# Altium PCB PCB1.PcbDoc
Units mm, origin at the board's own origin, x right, y up, seen from the top; angles counter-clockwise.
Board outline 67.2 x 57.2 mm, 2 copper layers (Top Layer, Bottom Layer); 54 components, 24 nets, 133 pads, 60 vias.
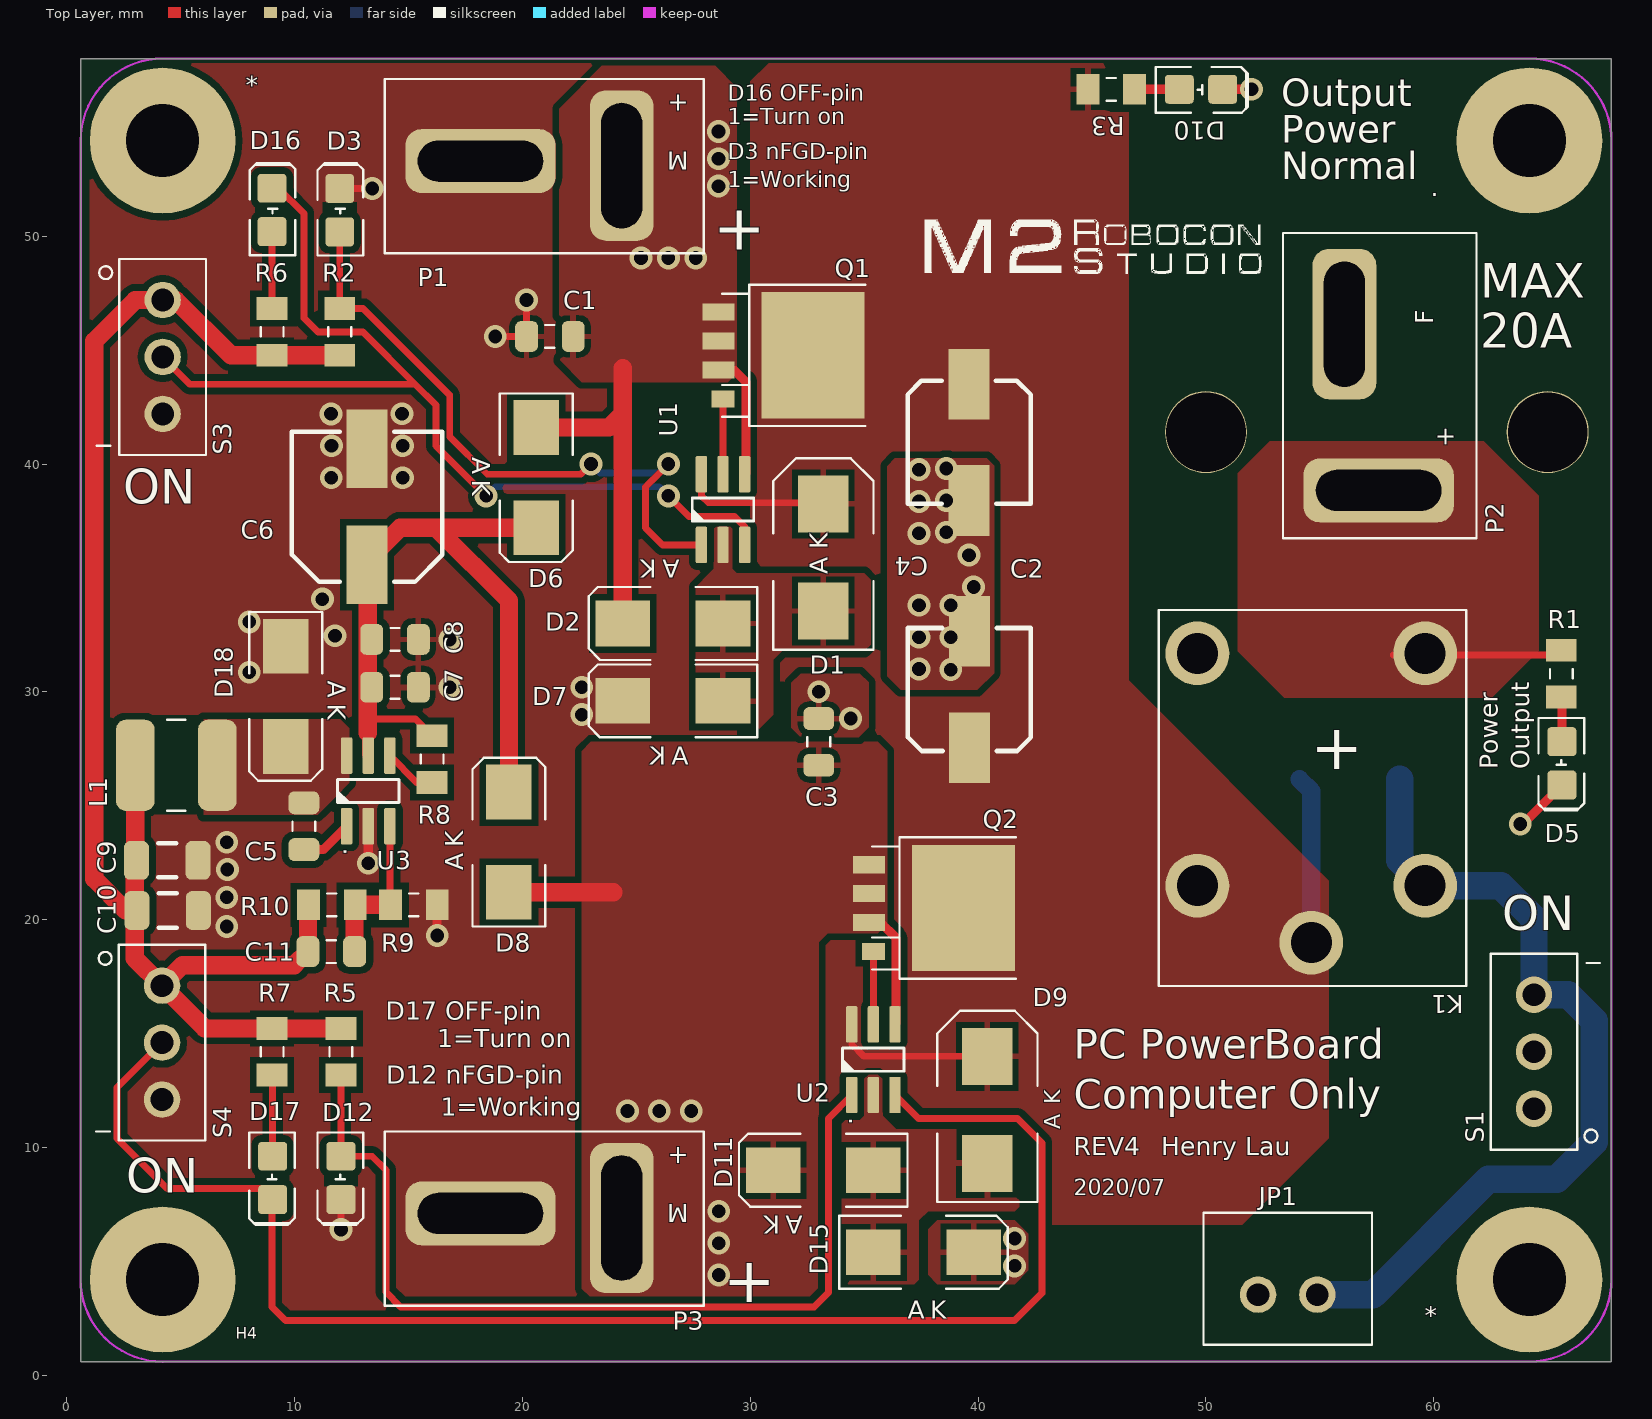
[diagram p0: Top Layer view]
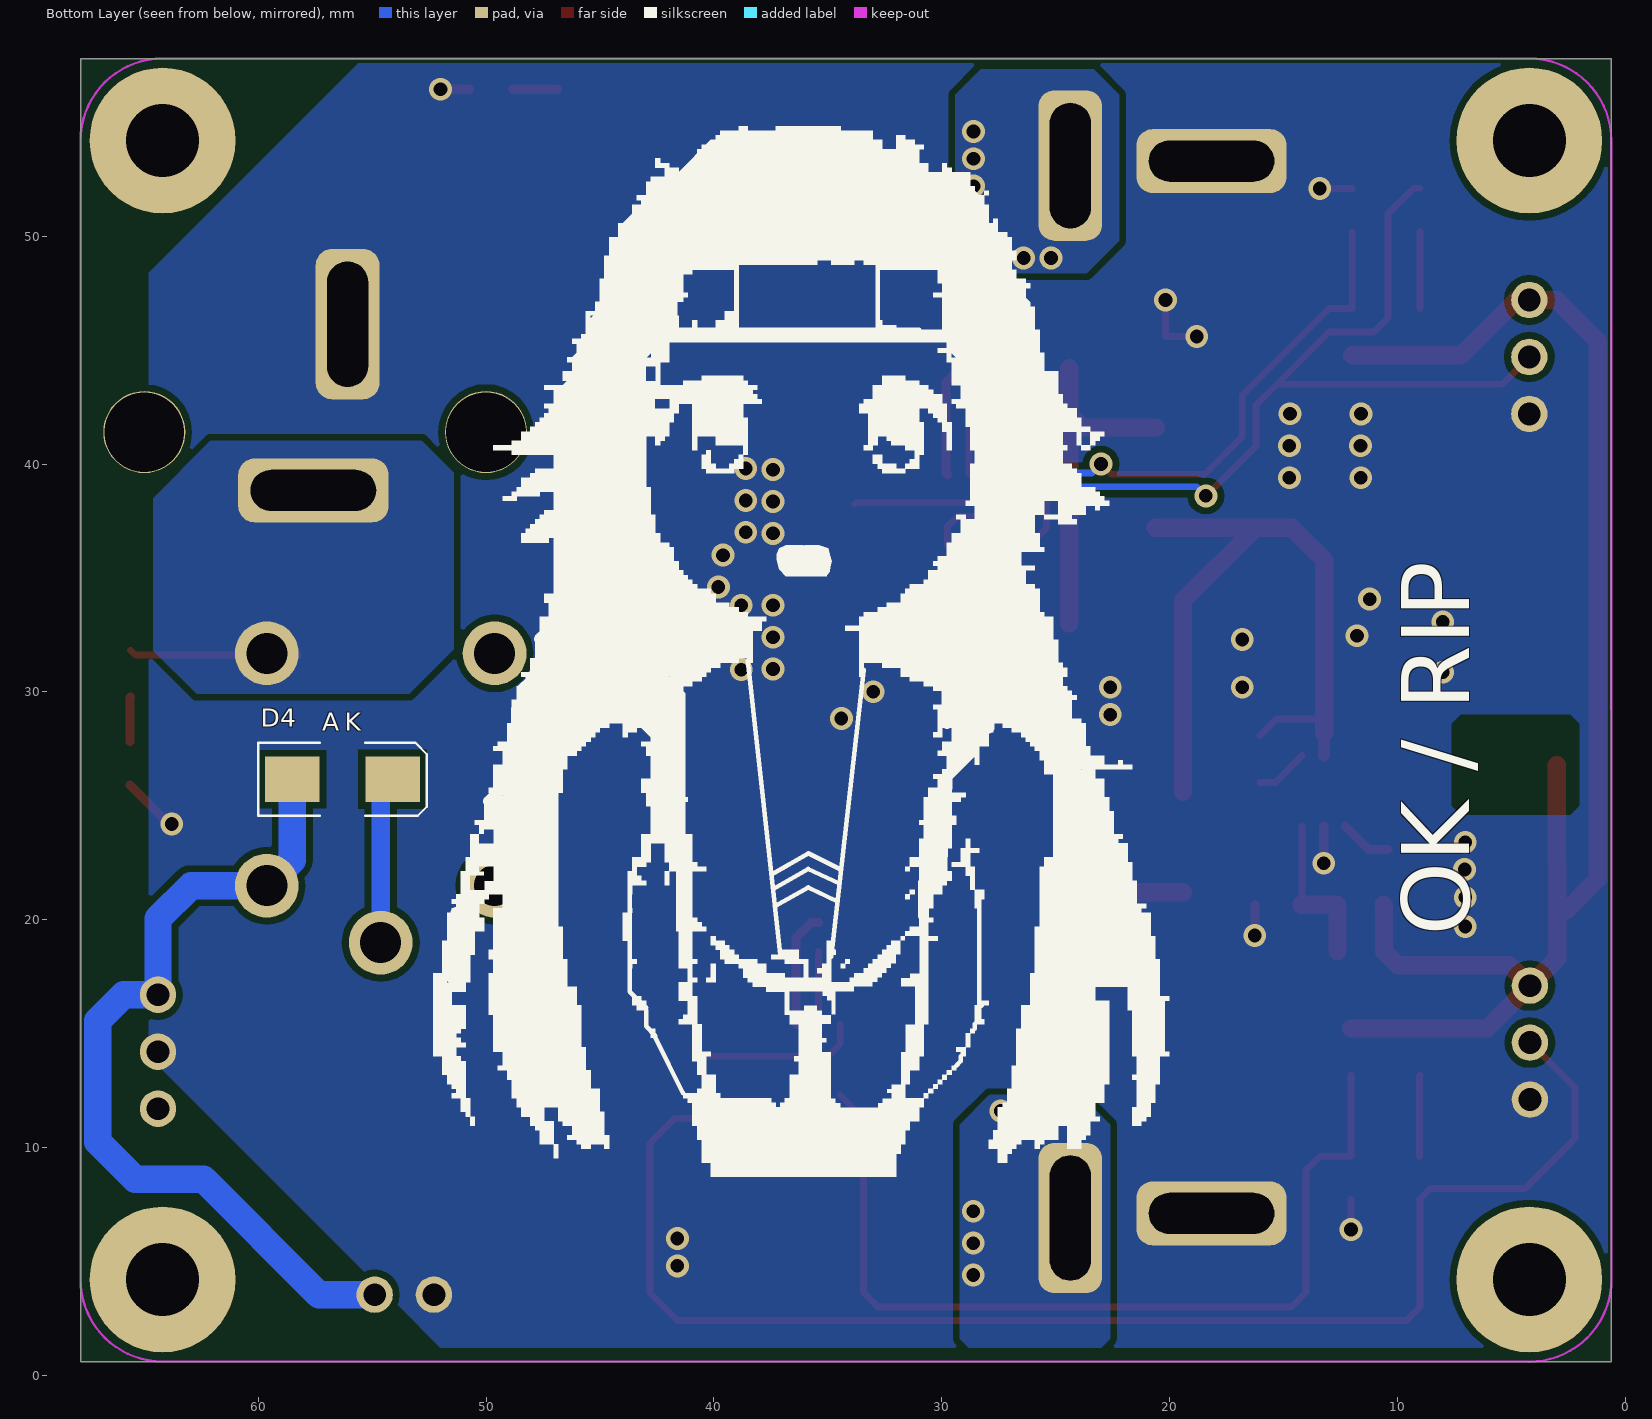
[diagram p1: Bottom Layer view, seen from below]
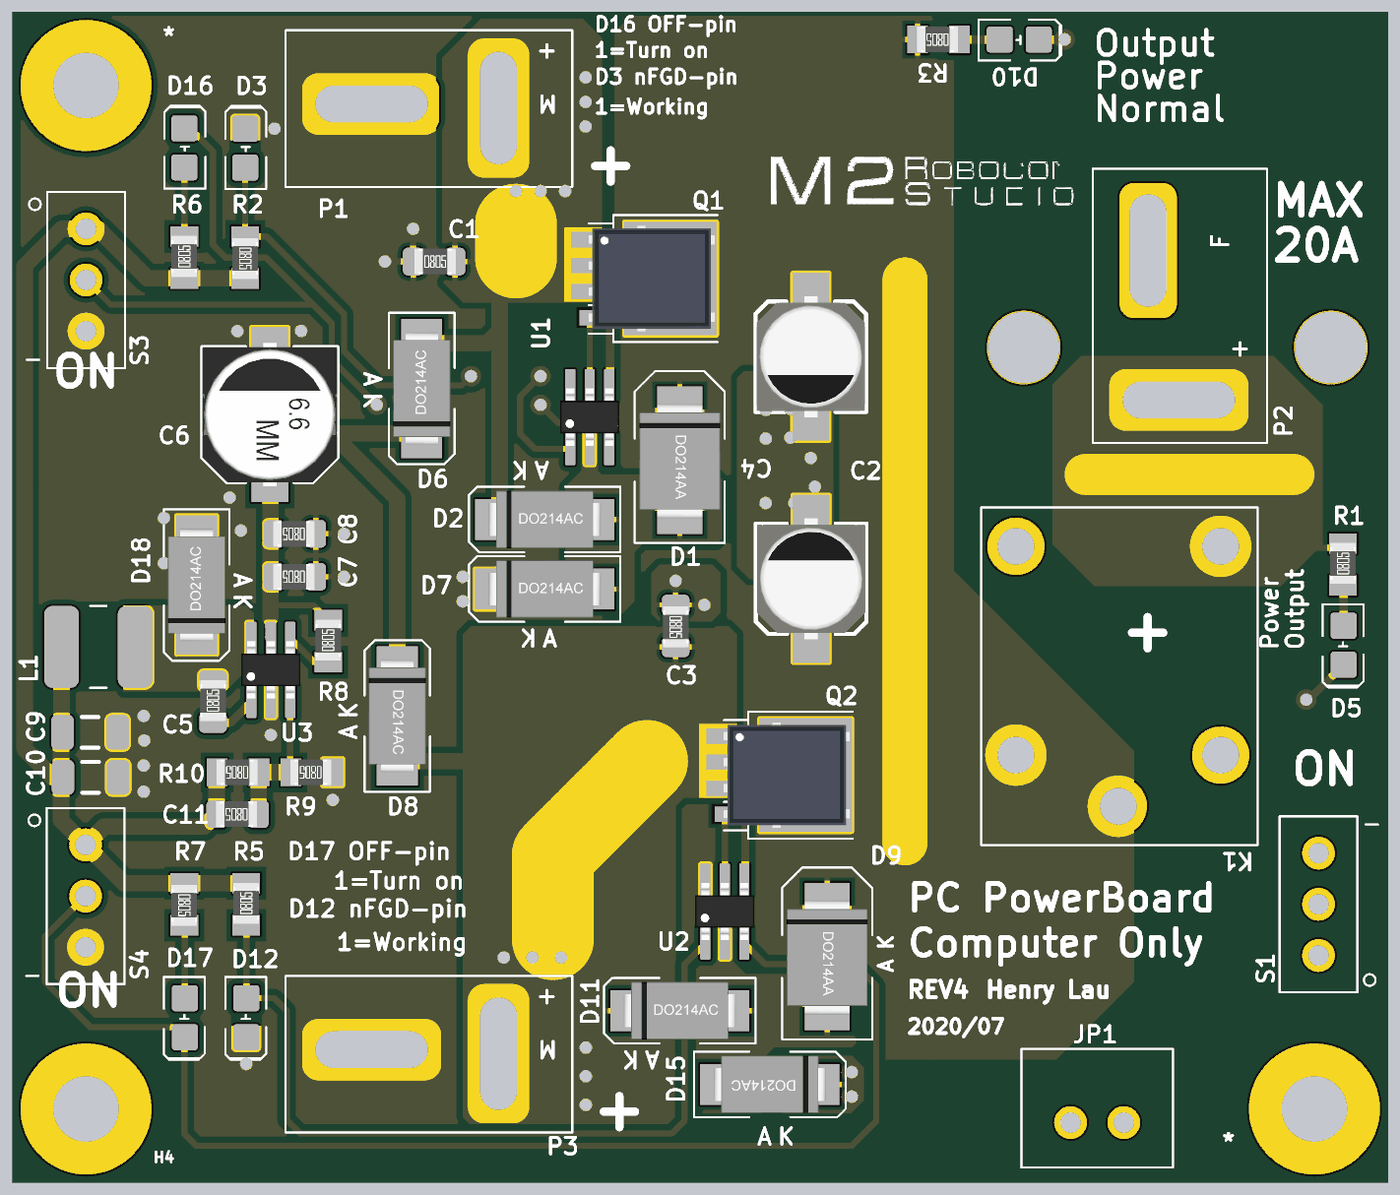
[diagram p2: 3D render of the assembled board from above, using the file's embedded part models]

## Layer stack, top to bottom
Top Solder: solder mask 0.0102, Solder Resist, Dk 3.5
Top Layer: signal copper 0.0356
Dielectric 1: dielectric 0.32, FR-4, Dk 4.8
Bottom Layer: signal copper 0.0356
Bottom Solder: solder mask 0.0102, Solder Resist, Dk 3.5

## Board outline
0.6,0.6 0.6,57.8 67.8,57.8 67.8,0.6

## Design rules (kind name [scope] priority, off if disabled: settings)
Clearance "Keepout clearance" [OnLayer('Keep-Out Layer')] p1: gap=0.1 ignorepadtopadclearanceinfootprint=FALSE
Clearance [All] p2: gap=0.3 ignorepadtopadclearanceinfootprint=FALSE
ComponentClearance "Under the fuse" [HasFootprint('Fuse')] p1: gap=0 collisioncheckmode=3 verticalgap=0 showdistances=FALSE
ComponentClearance ComponentClearance_1 [All] p2: gap=0.254 collisioncheckmode=3 verticalgap=0.254 showdistances=FALSE
Height [All] p1: minheight=0 maxheight=2539.975 prefheight=12.7
HoleSize [All] p1: absolutevalues=TRUE maxlimit=200 minlimit=0.025 maxpercent=80.000 minpercent=20.000
HoleToHoleClearance [All] p1: gap=0.2 allowstackedmicrovias=TRUE
MinimumSolderMaskSliver [All] p1: minsoldermaskwidth=0.2
PolygonConnect Via_connect [IsVia] p1: connectstyle=Direct reliefconductorwidth=0.254 reliefentries=4 polygonreliefangle="90 Angle" airgapwidth=0.254
PolygonConnect PolygonConnect_3 [All vs IsNamedPolygon('Top Layer-GND')] p2: connectstyle=Relief reliefconductorwidth=0.254 reliefentries=4 polygonreliefangle="90 Angle" airgapwidth=0.254
PolygonConnect PolygonConnect_2 [All vs IsNamedPolygon('Top Layer-GND 6')] p3: connectstyle=Relief reliefconductorwidth=0.254 reliefentries=4 polygonreliefangle="90 Angle" airgapwidth=0.254
PolygonConnect PolygonConnect_1 [All vs IsNamedPolygon('Top Layer-GND 5')] p4: connectstyle=Relief reliefconductorwidth=0.254 reliefentries=4 polygonreliefangle="90 Angle" airgapwidth=0.254
PolygonConnect Small_relay_in [HasFootprint('SRA Songle Relay') vs InNet('NetC2_A')] p5: connectstyle=Direct reliefconductorwidth=0.254 reliefentries=4 polygonreliefangle="90 Angle" airgapwidth=0.254
PolygonConnect Large_relay_In [HasFootprint('HE1AN-W-DC24V-Y6') vs InNet('NetC2_A')] p6: connectstyle=Direct reliefconductorwidth=0.254 reliefentries=4 polygonreliefangle="90 Angle" airgapwidth=0.254
PolygonConnect Fuse [HasFootprint('Fuse') vs InNet('NetC2_A')] p7: connectstyle=Direct reliefconductorwidth=0.254 reliefentries=4 polygonreliefangle="90 Angle" airgapwidth=0.254
PolygonConnect Out_Cap [HasFootprint('CAP AL C 5.3MM') vs InNet('NetC2_A')] p8: connectstyle=Direct reliefconductorwidth=0.254 reliefentries=4 polygonreliefangle="90 Angle" airgapwidth=0.254
PolygonConnect Large_relay_out [InNet('NetK2_Relay2') vs HasFootprint('HE1AN-W-DC24V-Y6')] p9: connectstyle=Direct reliefconductorwidth=0.254 reliefentries=4 polygonreliefangle="90 Angle" airgapwidth=0.254
PolygonConnect Small_relay_out [InNet('NetK1_NO')] p10: connectstyle=Direct reliefconductorwidth=0.254 reliefentries=4 polygonreliefangle="90 Angle" airgapwidth=0.254
PolygonConnect MP4251_Cap_GND [InNet('GND') vs HasFootprint('CAP 0805/2012')] p11: connectstyle=Relief reliefconductorwidth=0.254 reliefentries=4 polygonreliefangle="90 Angle" airgapwidth=0.254
PolygonConnect SW [InNet('SW')] p12: connectstyle=Direct reliefconductorwidth=0.254 reliefentries=4 polygonreliefangle="90 Angle" airgapwidth=0.254
PolygonConnect SMA_GND [HasFootprint('SMA (DO-214AC)') vs InNet('GND')] p13: connectstyle=Direct reliefconductorwidth=0.254 reliefentries=4 polygonreliefangle="90 Angle" airgapwidth=0.254
PolygonConnect LM5050 [HasFootprint('SOT23-6')] p14: connectstyle=Direct reliefconductorwidth=0.254 reliefentries=4 polygonreliefangle="90 Angle" airgapwidth=0.254
PolygonConnect NVMFS5C604NL [HasFootprint('NVMFS5C604NL')] p15: connectstyle=Direct reliefconductorwidth=0.254 reliefentries=4 polygonreliefangle="90 Angle" airgapwidth=0.254
PolygonConnect "T connector F" [HasFootprint('T CONNECTOR F')] p16: connectstyle=Direct reliefconductorwidth=0.254 reliefentries=4 polygonreliefangle="90 Angle" airgapwidth=0.254
PolygonConnect "T connector M" [HasFootprint('T CONNECTOR M')] p17: connectstyle=Direct reliefconductorwidth=0.254 reliefentries=4 polygonreliefangle="90 Angle" airgapwidth=0.254
PolygonConnect Via_GND [InNet('GND')] p18: connectstyle=Direct reliefconductorwidth=0.254 reliefentries=4 polygonreliefangle="90 Angle" airgapwidth=0.254
PolygonConnect [All] p19: connectstyle=Relief reliefconductorwidth=0.254 reliefentries=4 polygonreliefangle="90 Angle" airgapwidth=0.254
RoutingVias [All] p1: holewidth=6 width=10 viastyle="Through Hole" minholewidth=0.6 minwidth=1 maxholewidth=0.6 maxwidth=1
SilkToSilkClearance [All] p1: silktosilkclearance=0.1
SilkToSolderMaskClearance [IsPad] p1: minsilkscreentomaskgap=0.1 clearancetoexposedcopper=TRUE
SolderMaskExpansion [All] p1: expansion=0.102
Width [All] p1: maxlimit=10 minlimit=0.2 preferedwidth=0.3
23 further rules are at their usual default settings.

## Components (designator, comment, footprint, x,y, rotation, side; value= is the part's Value field where it differs from the comment)
* "Mounting: M3" "Mounting hole M3"#1 4.2,55.8 r0 top (schematic designator H3)
* "Mounting: M3" "Mounting hole M3"#2 61.8,5.8 r0 top (schematic designator H2)
. "Mounting: M3" "Mounting hole M3"#3 95.8,55.8 r0 top (schematic designator H1)
C1 "Cap : Unpolarized" "CAP 0805/2012" 21.2,45.6 r0 top value=1uF
C2 "Cap : Polarized" "CAP AL C 5.3MM" 39.6,40.95 r270 top value=22uF
C3 "Cap : Unpolarized" "CAP 0805/2012" 33,27.8 r270 top value=1uF
C4 "Cap : Polarized" "CAP AL C 5.3MM" 39.616,30.102 r90 top value=22uF
C5 "Cap : Unpolarized" "CAP 0805/2012" 10.4,24.1 r90 top value=0.1uF
C6 "Cap : Polarized" "CAP AL D 6.6MM" 13.176,38.123 r90 top value=47uF
C7 "Cap : Unpolarized" "CAP 0805/2012" 14.4,30.2 r180 top value=0.1uF
C8 "Cap : Unpolarized" "CAP 0805/2012" 14.4,32.3 r180 top value=0.1uF
C9 "Cap : Unpolarized" "CAP 1206/3216" 4.4,22.6 r180 top value=10uF
C10 "Cap : Unpolarized" "CAP 1206/3216" 4.42,20.4 r180 top value=10uF
C11 "Cap : Unpolarized" "CAP 0805/2012" 11.6,18.6 r180 top value=33pF
D1 "SMBJ70A" "SMB (DO-214AA)" 33.2,35.85 r90 top
D2 "SS36" "SMA (DO-214AC)" 26.6,33 r180 top
D3 "LED" "LED 0805/2012" 12,51.2 r90 top
D4 "SS36" "SMA (DO-214AC)" 56.3,26.16 r180 bottom
D5 "LED" "LED 0805/2012" 65.6,26.8 r270 top
D6 "SS36" "SMA (DO-214AC)" 20.6,39.4 r270 top
D7 "SS36" "SMA (DO-214AC)" 26.6,29.6 r180 top
D8 "SS36" "SMA (DO-214AC)" 19.4,23.4 r90 top
D9 "SMBJ70A" "SMB (DO-214AA)" 40.4,11.6 r90 top
D10 "LED" "LED 0805/2012" 49.84,56.424 r0 top
D11 "SS36" "SMA (DO-214AC)" 33.2,9 r180 top
D12 "LED" "LED 0805/2012" 12,8.6 r270 top
D15 "SS36" "SMA (DO-214AC)" 37.6,5.4 r0 top
D16 "LED" "LED 0805/2012" 9.026,51.212 r90 top
D17 "LED" "LED 0805/2012" 9,8.6 r270 top
D18 "SS12" "SMA (DO-214AC)" 9.6,29.8 r270 top
H4 "Mounting: M3" "Mounting hole M3"#4 4.2,4.2 r0 top
JP1 "2-Pins Header" "2-Pins Header" 53.588,4.335 r180 top
K1 "SRA Songle Relay" "SRA Songle Relay" 54.922,25.088 r90 top
L1 "SWPA4018S4R7MT" SWPA4018S4R7MT 4.8,26.775 r270 top value=4.7uH
P1 "T-Connector : M" "T CONNECTOR M" 21.8,53.2 r180 top
P2 "T-Connector : F" "T CONNECTOR F" 57.879,43.738 r90 top
P3 "T-Connector : M" "T CONNECTOR M" 21.8,7 r180 top
Q1 "NVMFS5C604NL" NVMFS5C604NL 32.75,44.77 r270 top
Q2 "NVMFS5C604NL" NVMFS5C604NL 39.35,20.51 r270 top
R1 "Res" "RES 0805/2012" 65.6,30.8 r90 top value=4.7k
R2 "Res" "RES 0805/2012" 11.974,45.8 r270 top value=1k
R3 "Res" "RES 0805/2012" 45.84,56.45 r180 top value=4.7k
R5 "Res" "RES 0805/2012" 12.026,14.2 r90 top value=1k
R6 "Res" "RES 0805/2012" 9,45.8 r90 top value=1k
R7 "Res" "RES 0805/2012" 9,14.2 r270 top value=1k
R8 "Res" "RES 0805/2012" 16.025,27.05 r90 top value=100k
R9 "Res" "RES 0805/2012" 15.225,20.65 r180 top value=23.7k
R10 "Res" "RES 0805/2012" 11.625,20.65 r180 top value=124k
S1 "3-Pins Switch" "3-Pins Switch" 64.4,14.2 r270 top
S3 "3-Pins Switch" "3-Pins Switch" 4.2,44.7 r90 top
S4 "3-Pins Switch" "3-Pins Switch" 4.175,14.6 r90 top
U1 "LM5050-2" SOT23-6 28.8,38 r90 top
U2 "LM5050-2" SOT23-6 35.4,13.85 r90 top
U3 "MP2451" SOT23-6 13.225,25.65 r90 top

## Footprints (in the part's own frame and the unit in brackets; to place one, negate y for a bottom-side part, rotate by r counter-clockwise, add the part's x,y. Pads: shape width x height; smd on the part's side, far side on the other; paste and mask are expansions set on the pad)
"2-Pins Header" [mm] "2-Pins Header with plastic surrounded"
  round 1.6 hole 1: 1(-1.3,0.8) 2(1.3,0.8)
  silkscreen extent -3.7,-2.8 3.7,3
"3-Pins Switch" [mm] "SS12d00G3"
  round 1.6 hole 1: 1(-2.5,0) 2(0,0) 3(2.5,0)
  silkscreen extent -4.3,-1.9 4.3,2.9
"CAP 0805/2012" [mm] "Cap ; 2.00x1.25mm ; EIA 0805 ; IPC Medium Density"
  rrect50% 1x1.35 smd: 1(-1.025,0) 2(1.025,0)
  silkscreen extent -0.2,-0.5 0.2,0.5, body extent -0.95,-0.62 1.05,0.63, height 0.6
"CAP 1206/3216" [mm] "Cap ; 3.2x1.6mm ; EIA 1206 ; IPC Medium Density"
  rrect50% 1.1x1.7 smd: 1(-1.35,0) 2(1.35,0)
  silkscreen extent -0.4,-0.75 0.4,0.75, body extent -1.7,-0.9 1.7,0.9, height 1.3
"CAP AL C 5.3MM" [mm] "Al Electrolytic Cap ; 5.30x5.30x5.80mm ; IPC Low Density"
  rect 3.1x1.8 smd: A(-2.55,0) K(2.55,0)
  silkscreen extent -2.7,-2.7 2.7,2.7, body extent -2.95,-2.65 2.95,2.65, height 5.41
"CAP AL D 6.6MM" [mm] "Al Electrolytic Cap ; 6.60x6.60x7.70mm ; IPC Low Density"
  rect 3.45x1.8 smd: A(-2.55,0) K(2.55,0)
  silkscreen extent -3.3,-3.3 3.3,3.3, body extent -3.5,-3.3 3.5,3.3, height 7.7
"LED 0805/2012" [mm] "LED ; EIA 0805"
  rrect25% 1.27x1.27 smd: A(-1.011,0.026) K(0.894,0.026)
  Top Layer pour cut-out: -0.44,0.788 0.322,0.788 0.322,-0.736 -0.44,-0.736
  silkscreen extent -2.05,-1 2,1, body extent -1.06,-0.6 0.94,0.65, height 0.8
"Mounting hole M3"#1 [mm] "M2 standard mounting hole ; For M3 pillar"
  round 6.4 hole 3.2: 0(0,-1.6)
"Mounting hole M3"#2 [mm] "M2 standard mounting hole ; For M3 pillar"
  round 6.4 hole 3.2: 0(2.4,-1.6)
"Mounting hole M3"#3 [mm] "M2 standard mounting hole ; For M3 pillar"
  round 6.4 hole 3.2: 0(-31.6,-1.6)
"Mounting hole M3"#4 [mm] "M2 standard mounting hole ; For M3 pillar"
  round 6.4 hole 3.2: 0(0,0)
NVMFS5C604NL [mm] "Power MOSFET ; 60 V ; 1.2 mR ; 287A ; Single N-Channel"
  rect 5.55x4.53 smd: D(0,0)
  rect 0.75x1 smd: G(1.91,-3.95)
  rect 0.75x1.4 smd: S(-1.9,-4.15) S(-0.63,-4.15) S(0.64,-4.15)
  silkscreen extent -3.1,-4 3.1,2.3, body extent -2.57,-4 2.57,2.15, height 1.13
"RES 0805/2012" [mm] "Res ; 2.00x1.25mm ; IPC Medium Density"
  rect 1x1.35 smd: 1(-1.025,0) 2(1.025,0)
  silkscreen extent -0.2,-0.5 0.2,0.5, body extent -0.95,-0.62 1.05,0.63, height 0.6
"SMA (DO-214AC)" [mm]
  rect 2.4x2 smd: A(-2.2,0) K(2.2,0)
  silkscreen extent -3.7,-1.6 3.7,1.6, body extent -2.74,-1.4 2.74,1.4, height 2.34
"SMB (DO-214AA)" [mm]
  rect 2.5x2.2 smd: A(-2.3,0) K(2.4,0)
  silkscreen extent -4,-2.2 4.4,2.2, body extent -2.79,-1.97 2.79,1.97, height 2.8
SOT23-6 [mm]
  round 0.5 on Mech15: 0(0,0)
  rrect25% 1.6x0.5 smd: 1(-1.55,0.95) 2(-1.55,0) 3(-1.55,-0.95) 4(1.55,-0.95) 5(1.55,0) 6(1.55,0.95)
  silkscreen extent -0.51,-1.35 0.51,1.35, body extent -1.4,-1.45 1.4,1.45, height 1.44
"SRA Songle Relay" [mm] "Songle Relay ; SRA ; 5 pins ; 20A"
  round 2.8 hole 1.8: 1(-3.6,5.3) 2(-3.6,-4.7) CO(-6.1,0.3) NC(6.6,5.3) NO(6.6,-4.7)
  silkscreen extent -8,-6.5 8.5,7, body extent -8,-6.5 8.5,7, height 14.2
SWPA4018S4R7MT [mm] "Wire Wound SMD Power Inductor ; 4.7uH ; 1.7A"
  rrect50% 4x1.7 smd: 1(0,1.8) 2(0,-1.8)
  silkscreen extent -2,-0.4 2,0.4
"T CONNECTOR F" [mm] "T-shape connector ; Female side"
  rrect50% 6.6x2.8 hole 1.8 slot 5.5 at 0 deg: N(2.4,1.8)
  rrect50% 2.8x6.6 hole 1.8 slot 5.5 at 90 deg: P(-4.9,0.3)
  silkscreen extent -7,-4 6.4,4.5
"T CONNECTOR M" [mm] "T-shape connector ; Male side"
  rrect50% 6.6x2.8 hole 1.8 slot 5.5 at 0 deg: N(3.65,-0.1)
  rrect50% 2.8x6.6 hole 1.8 slot 5.5 at 90 deg: P(-2.55,0.1)
  silkscreen extent -6.15,-3.7 7.85,3.95

## Part data
* * . H4: "Mounting Hole: M3"
C1 C3 C5 C7 C8 C9 C10 C11: "Unpolarized Capacitor"
C2 C4 C6: "Polarized Capacitor"
D1 D9: "Transient Voltage Suppression Diodes", ComponentLink1Description=SMBJ70A, ComponentLink1URL=http://www.littelfuse.com/~/media/electronics/datasheets/tvs_diodes/littelfuse_tvs_diode_smbj_datasheet.pdf.pdf, ComponentLink2Description=SMBJ70A_TaoBao, ComponentLink2URL=https://item.taobao.com/item.htm?spm=a230r.1.14.18.167673edhP2qwe&id=564794336232&ns=1&abbucket=13#detail, Name=SMBJ70A
D2 D4 D6 D7 D8 D11 D15 D18: "Surface Mount Schottky Barrier Rectifier"
  D2 D4 D6 D7 D8 D11 D15: ComponentLink1Description=SS36, ComponentLink1URL=https://www.vishay.com/docs/88751/ss32.pdf, ComponentLink2Description=SS36_TaoBao, ComponentLink2URL=https://item.taobao.com/item.htm?spm=a1z0d.7625083.1998302264.6.686c4e69YVpoGp&id=545485003984, Name=SS36
  D18: ComponentLink1Description=SS12, ComponentLink1URL=https://www.vishay.com/docs/88746/ss12.pdf, ComponentLink2Description=SS12_TaoBao, ComponentLink2URL=https://item.taobao.com/item.htm?spm=a1z10.3-c-s.w4002-16569462289.23.52e96a4bPeluV8&id=545464510804, Name=SS12
K1: "20A Relay", ComponentLink1Description="SRA Songle Relay", ComponentLink1URL=https://www.rlocman.ru/i/File/2018/02/21/SRA--T74-.pdf
L1: "Wire Wound SMD Power Inductor ; 4.7uH ; 1.7A", ComponentLink1Description=SWPA4018S4R7MT, ComponentLink1URL=https://www.datasheets360.com/pdf/-5671755628400742870
P1 P3: "T-shape connector ; Male side", Name="T-Connector : M"
P2: "T-shape connector ; Female side", Name="T-Connector : F"
Q1 Q2: "Power MOSFET ; 60 V ; 1.2 mR ; 287A ; Single N-Channel", ComponentLink1Description=NVMFS5C604NL, ComponentLink1URL=http://www.onsemi.cn/PowerSolutions/document/NVMFS5C604NL-D.PDF, Name=NVMFS5C604NL
R1 R2 R3 R5 R6 R7 R8 R9 R10: "Resistor"
S1 S3 S4: "SS12d00G3", ComponentLink1Description=SS12d00G3, ComponentLink1URL=https://item.taobao.com/item.htm?spm=a1z09.2.0.0.42022e8dz0ovVy&id=522571770484&_u=133pjrv7231a, Name="3-Pins Switch"
U1 U2: "High-Side OR-ing FET Controller", ComponentLink1Description=LM5050-2, ComponentLink1URL=http://www.ti.com/lit/ds/symlink/lm5050-2.pdf, Name=LM5050-2
U3: "Step-Down Converter ; 36V ; 2MHz ; 0.6A", ComponentLink1Description=MP2451, ComponentLink1URL=https://www.mouser.com/ds/2/277/MP2451_r1.33-477967.pdf, Name=MP2451
JP1: Name=JSF-XH

## Free pads (board coordinates)
  round 3.6 hole 3.5: 5(50,41.4) 6(65,41.4)

## Via types
v1: diameter 1, hole 0.6, Top Layer to Bottom Layer, tented both sides, 60 vias

## Nets (pads, with @x,y where several pads share a name; then routed paths per layer and width w, separated by ;. In a path a pad name is that pad's centre, name@x,y a point inside that pad or via, vN(x,y) a via of type N, cw(c..) or ccw(c..) an arc to the next point about the centre after c; other vN are vias at no path point)
5V: C9.2 C10.2 C11.2 L1.2 R2.2 R5.2 R6.1 R7.1 R10.2 S3.3 S4.3 | length 66.4
  Top Layer w0.8: L1.2 3,22.625 2.975,22.6 C10.2@2.975,20.4 ; R10.2 10.575,20.625 C11.2 9.975,18 5.075,18 S4.3 ; R2.2 R6.1 7.195,44.775 4.77,47.2 S3.3 3,47.2 1.2,45.4 1.2,21.778 2.578,20.4 C10.2@2.975,20.4 ; R5.2 R7.1 6.05,15.225 S4.3 ; C10.2@2.975,20.4 2.975,18.3 S4.3
BUCK_VIN: C6.A C7.2 C8.2 D6.K D8.K R8.2 U3.5 | length 32.6
  Top Layer w0.3: 13.2,28.8 15.3,28.8 R8.2
  Top Layer w0.5: 13.2,28.2 13.2,27.225 U3.5
  Top Layer w0.8: 13.2,28.2 13.2,28.8 13.2,30.05 13.2,32.05 13.2,34.05 13.2,35.775 14.625,37.2 16.2,37.2 ; D8.K 19.4,34 16.2,37.2 ; D6.K 16.2,37.2
GND: C1.1 C2.K C3.1 C4.K C6.K C7.1 C8.1 C9.1 C10.1 D3.K D5.K D7.K D10.K D12.K D15.K D18.A JP1.2 P1.N P2.N P3.N R9.1 S1.2 S3.1 S4.1 U3.2 | length 12.7
  Top Layer w0.3: D3.K v1(13.4,52.094) ; v1@12.026,6.226 D12.K ; v1(18.8,45.6) C1.1 v1(20.175,47.2)
  Top Layer w0.4: v1(13.225,22.473) U3.2 ; v1(16.25,19.3) R9.1 ; D10.K v1(52,56.45) ; v1(63.8,24.2) 63.919,24.2 D5.K
  other v1: 41.6,4.8 41.6,6 12.026,6.4 7.012,19.7 7.012,20.975 7.04,22.2 7.012,23.4 34.4,28.825 22.6,29 33,30 16.8,30.2 22.6,30.2 8,30.859 38.8,30.975 37.4,31 16.8,32.3 37.4,32.4 38.8,32.4 11.765,32.459 8,33.07 37.4,33.8 38.8,33.8 11.212,34.07 39.8,34.6 39.6,36 37.4,36.954 38.6,37 37.4,38.354 38.6,38.4 11.6,39.4 14.732,39.4 37.4,39.754 38.6,39.8 11.61,40.8 14.732,40.8 11.591,42.2 14.704,42.211
NetC2_A: C2.A C4.A D1.K D4.K D9.K K1.1 K1.CO Q1.D Q2.D R3.2 U1.6 U2.6 | length 21.5
  Top Layer w0.3: U1.6 27.85,38.601 28.151,38.3 33.75,38.3 D1.K@33.8,38.25 ; U2.6 34.45,14.529 34.979,14 D9.K
  Bottom Layer w0.8: D4.K 54.622,25.638 K1.CO
NetC5_1: C5.1 U3.1 | length 2.3
  Top Layer w0.4: C5.1 11.25,23.075 U3.1
NetC11_1: C11.1 R9.2 R10.1 U3.3 | length 7.1
  Top Layer w0.3: U3.3 14.175,20.675 R9.2
  Top Layer w0.8: C11.1 12.625,20.625 R10.1 R9.2
NetD1_A: D1.A D2.A D7.A U1.2
NetD3_A: D3.A R2.1 U1.1 | length 28.4
  Top Layer w0.3: D3.A R2.1 13,46.825 16.8,43.025 16.8,41.2 18.449,39.551 18.792,39.551 18.794,39.55 22.55,39.55 v1(23,40) ; v1(26.4,40) 25.4,39 25.4,37.2 26.15,36.45 U1.1
  Bottom Layer w0.3: v1(23,40) 23.4,39.6 26,39.6 v1(26.4,40)
NetD4_A: D4.A JP1.1 K1.2 S1.1 | length 37.2
  Bottom Layer w1.2: JP1.1 57.335,3.535 62.4,8.6 65.4,8.6 67.04,10.24 67.04,15.56 65.9,16.7 S1.1 64.4,20.038 62.95,21.488 K1.2 58.5,22.61 D4.A
NetD5_A: D5.A R1.1 | length 2
  Top Layer w0.4: R1.1 65.626,29.749 D5.A
NetD9_A: D9.A D11.A D15.A U2.2
NetD10_A: D10.A R3.1 | length 2
  Top Layer w0.4: R3.1 D10.A
NetD12_A: D12.A R5.1 U2.1 | length 40.2
  Top Layer w0.3: R5.1 D12.A 13.389,9.611 14,9 14,3.65 14.65,3 32.8,3 33.425,3.625 33.425,11.275 U2.1
NetD16_A: D16.A R6.2 | length 3.4
  Top Layer w0.3: R6.2 D16.A
NetD17_A: D17.A R7.2 | length 3.6
  Top Layer w0.3: R7.2 9.026,13.149 D17.A
NetK1_NO: K1.NO P2.P R1.2 | length 7.5
  Top Layer w0.3: 58.222,31.617 65.392,31.617 R1.2
NetQ1_G: Q1.G U1.5 | length 3.3
  Top Layer w0.3: U1.5 Q1.G
NetQ2_G: Q2.G U2.5 | length 3.2
  Top Layer w0.3: U2.5 Q2.G
NetR8_1: R8.1 U3.4 | length 2.3
  Top Layer w0.3: U3.4 15.35,26.025 R8.1
OFF1: D16.K S3.2 U1.3 | length 43.7
  Top Layer w0.3: S3.2 5.4,43.5 15.288,43.5 ; D16.K 9.295,52.105 10.4,51 10.4,46.4 11.012,45.788 13,45.788 15.288,43.5 ; v1@18.726,38.601 v1(18.399,38.601) 16.2,40.8 16.2,42.588 15.288,43.5 ; v1(26.4,38.6) 27.3,37.7 29.3,37.7 29.75,37.25 U1.3
  Bottom Layer w0.3: v1(18.399,38.601) 18.798,39 26,39 v1(26.4,38.6)
OFF2: D17.K S4.2 U2.3 | length 66.1
  Top Layer w0.3: S4.2 2.2,12.625 2.2,10.4 4.4,8.2 8.533,8.2 D17.K 9,7.681 9,3 9.6,2.4 41.6,2.4 42.8,3.6 42.8,10.2 41.725,11.275 37.375,11.275 U2.3
SW: C5.2 D18.K L1.1 U3.6
VIN1: C1.2 D2.K D6.A P1.P Q1.S U1.4 | length 20.5
  Top Layer w0.4: Q1.S@28.8,44.13 29.273,44.13 29.8,43.603 29.8,39.6 U1.4
  Top Layer w0.8: D6.A 23.789,41.6 24.4,42.211 ; D2.K 24.4,42.211 ; 24.4,44.2 24.4,42.211
  other v1: 25.2,49.044 26.4,49.044 27.6,49.044 28.6,52.2 28.6,53.4 28.6,54.6
VIN2: C3.2 D8.A D11.K P3.P Q2.S U2.4 | length 9.7
  Top Layer w0.4: Q2.S@35.4,19.87 35.73,19.87 36.35,19.25 36.35,19.232 36.4,19.182 36.4,15.45 U2.4
  Top Layer w0.8: D8.A 23.977,21.2
  other v1: 28.609,4.4 28.609,5.8 28.609,7.2 24.603,11.6 26.003,11.6 27.403,11.6
pads on no net: *.0 ..0 H4.0 K1.NC S1.3 U1.0 U2.0 U3.0

## Polygon pours and split planes (outlines as drawn)
NetK1_NO on Top Layer "NETJ1_2_L01_P-001" (solid, pour order 109): 52.8,41 62.2,41 64.6,38.6 64.6,31.8 62.549,29.749 53.426,29.749 51.4,31.775 51.4,39.6
GND on Top Layer "Top Layer-GND 1" (solid, remove dead copper, pour order 105): 1,57.6 29.4,57.6 29.4,0.6 1,0.6
no net on Top Layer "Top Layer-No Net 4" (solid, remove dead copper, pour order 91): 45.569,55.521
GND on Top Layer "Top Layer-No Net 2" (solid, remove dead copper, pour order 49): 32.212,28.004 31.8,28.412 31.8,30.388 32.212,30.8 34.809,30.8 35.2,30.409 35.2,28.437 34.763,28
NetC2_A on Top Layer "Top Layer-NetC2_A" (solid, remove dead copper, pour order 69): 30,56.8 30,6.6 51.6,6.6 55.4,10.4 55.4,21.704 46.6,30.503 46.6,57.6 30.8,57.6
GND on Top Layer "Top Layer-GND 2" (solid, remove dead copper, pour order 63): 36,39.913 36.337,40.25 40.377,40.25 40.695,39.932 40.695,30.817 39.963,30.085 36.599,30.085 36,30.684
no net on Top Layer "Top Layer-No Net 3" (solid, remove dead copper, pour order 60): 16.25,20.65
SW on Top Layer "Top Layer-SW" (solid, remove dead copper, pour order 58): 5.6,28.4 6,28.8 12,28.8 12.4,28.4 12.4,26 11.8,25.4 11.2,24.8 11,24.6 6,24.6 5.6,25
no net on Top Layer "Top Layer-No Net" (solid, remove dead copper, pour order 56): 12.6,26.4
NetD1_A on Top Layer "Top Layer-NetD1_A" (solid, remove dead copper, pour order 55): 28.4,37.2 28.6,37.4 29,37.4 29.2,37.2 29.2,35.4 29.4,35.2 35,35.2 35.273,34.927 35.273,32.073 35,31.8 31.4,31.8 31,31.4 31,29 30.2,28.2 27.6,28.2 27.6,34.6 28.2,35.2 28.4,35.4
no net on Top Layer "Top Layer-No Net 1" (solid, remove dead copper, pour order 54): 22.6,30.4
GND on Top Layer "Top Layer-GND" (solid, remove dead copper, pour order 52): 37.8,6.4 38.2,6.8 41.6,6.8 42.2,6.2 42.2,4.6 41.6,4 38.2,4 37.8,4.4
NetD9_A on Top Layer "Top Layer-NetD9_A" (solid, remove dead copper, pour order 51): 35,13 35.2,13.2 35.6,13.2 35.8,13 35.8,11.4 36.4,10.8 41.4,10.8 41.8,10.4 41.8,7.4 41.6,7.2 37.8,7.2 37.4,6.8 37.4,4.2 37.2,4 34.2,4 34,4.2 34,11.035 34.165,11.2 34.8,11.2 35,11.4
VIN2 on Top Layer "Top Layer-VIN2" (solid, remove dead copper, pour order 50): 22.6,3.8 23,3.4 32.6,3.4 33,3.8 33,19 33.4,19.4 35.6,19.4 36,19.8 36,27.4 35.6,27.8 23,27.8 22.6,27.4
VIN1 on Top Layer "Top Layer-VIN1" (solid, remove dead copper, pour order 48): 29,43.6 29.4,44 29.4,56.527 28.454,57.473 23.473,57.473 21.6,55.6 21.6,44.6 22.6,43.6
NetK1_NO on Bottom Layer "NETJ1_2_L01_P-001" (solid, pour order 47): 62.708,29.908 53.376,29.908 51.412,31.872 51.412,39.612 52.816,41.016 62.097,41.016 64.612,38.501 64.612,31.812
GND on Bottom Layer "Bottom Layer-GND" (solid, remove dead copper, pour order 107): 0.6,57.6 0.6,1.2 52,1.2 64.8,14 64.8,48.4 55.6,57.6
VIN1 on Bottom Layer "Bottom Layer-VIN1" (solid, remove dead copper, pour order 97): 22.2,56.2 23.328,57.328 28.272,57.328 29.4,56.2 29.4,49.161 28.61,48.37 23.63,48.37 22.2,49.8
VIN2 on Bottom Layer "Bottom Layer-VIN2" (solid, remove dead copper, pour order 95): 22.6,1.6 22.6,11 23.901,12.301 27.899,12.301 29.2,11 29.2,1.6 28.8,1.2 23,1.2
no net on Bottom Overlay "NETJ1_2_L01_P-001" (solid): 36.646,35.081 36.407,35.081 35.04,35.081 35.04,35.128 34.902,35.265 34.883,35.488 34.828,35.729 34.883,35.94 34.974,36.294 35.378,36.435 36.006,36.435 36.04,36.402 36.073,36.435 36.84,36.435 37.122,36.294 37.24,36.035 37.24,35.792 37.122,35.386 36.84,35.081
no net on Bottom Overlay "NETJ1_2_L01_P-001" (solid): 42.743,36.741 43.149,36.741 43.352,36.538 43.352,35.116 42.743,35.116
no net on Bottom Overlay "NETJ1_2_L01_P-001" (solid): 42.54,35.42 42.946,35.42 43.149,35.217 43.149,33.795 42.54,33.795
no net on Bottom Overlay "NETJ1_2_L01_P-001" (solid): 42.54,33.185 42.946,33.185 43.149,32.982 43.149,31.56 42.54,31.56
no net on Bottom Overlay "NETJ1_2_L01_P-001" (solid): 42.768,33.095
no net on Bottom Overlay "NETJ1_2_L01_P-001" (solid): 41.651,27.406 42.362,27.406 42.565,27.203 42.565,23.748 42.362,23.545 41.752,23.545 41.752,25.679 41.651,25.78
no net on Bottom Overlay "NETJ1_2_L01_P-001" (solid): 43.378,28.625 41.651,26.898 41.651,19.481 40.33,19.481 40.94,20.091 40.94,21.513 41.244,21.818 41.244,29.946 42.768,31.47 43.378,31.47
no net on Bottom Overlay "NETJ1_2_L01_P-001" (solid): 24.074,28.422 24.074,26.39 24.683,26.39 25.496,27.203 25.496,29.235 25.903,29.641 25.903,32.689 25.496,33.095 25.09,33.095 25.09,30.251 24.887,30.047
no net on Bottom Overlay "NETJ1_2_L01_P-001" (solid): 21.839,23.139 21.839,21.107 23.261,21.107 23.261,23.139
no net on Bottom Overlay "NETJ1_2_L01_P-001" (solid): 20.62,13.791 20.62,15.417 20.416,15.62 20.416,17.246 21.026,17.855 21.026,20.091 21.839,20.091 22.245,20.497 22.855,20.497 22.855,18.871 22.448,18.465 22.448,18.059 21.229,16.839 21.229,13.995 21.026,13.791
no net on Bottom Overlay "NETJ1_2_L01_P-001" (solid): 22.855,13.791 22.855,16.027 23.464,16.636 23.464,23.951 22.855,24.561 22.855,25.577 24.277,26.999 24.582,26.999 24.684,26.898 24.48,26.695 24.48,21.513 24.684,21.31 24.684,13.79
no net on Bottom Overlay "NETJ1_2_L01_P-001" (solid): 44.191,50.571 43.988,50.571 43.175,51.383 43.175,51.587 42.159,52.603 41.549,52.603 41.549,52.806 40.127,54.228 37.892,54.228 37.892,53.619 37.079,53.619 36.876,53.415 33.015,53.415 31.389,51.79 29.967,51.79 29.967,50.571 30.576,49.961 42.362,49.961 42.768,49.555 43.378,49.555
no net on Bottom Overlay "NETJ1_2_L01_P-001" (solid): 44.191,50.571
no net on Bottom Overlay "NETJ1_2_L01_P-001" (solid): 29.764,52.603 29.764,45.084 28.951,44.271 28.951,42.646 28.544,42.239 28.544,40.817 28.341,40.614 28.341,39.801 27.935,39.395 26.716,39.395 24.684,41.427 24.684,42.646 25.7,43.662 25.7,44.475 26.106,44.881 26.106,47.098 26.919,47.911 26.919,49.555 27.935,50.571 27.935,50.977 28.138,51.18 28.138,51.587 29.154,52.603
no net on Bottom Overlay "NETJ1_2_L01_P-001" (solid): 42.997,41.223 42.997,44.652 41.597,46.052 41.597,47.59 44.969,47.59 45.004,47.624 45.004,45.897 46.223,44.678 46.223,43.865 47.036,43.052 47.036,37.402 47.036,29.641 42.997,29.641
no net on Bottom Overlay "NETJ1_2_L01_P-001" (solid): 40.94,49.555 40.94,48.742 44.597,45.084 45.41,45.084 45.41,46.405 44.597,47.218 44.597,49.555
no net on Bottom Overlay "NETJ1_2_L01_P-001" (solid): 22.448,11.474
no net on Bottom Overlay "NETJ1_2_L01_P-001" (solid): 23.464,17.043 23.871,17.043 23.871,11.759 23.464,11.759

## Keep-outs
Keep-Out Layer:
  lines w0.1: 0.594,4.2 ccw(c4.2,4.2) 4.2,0.594 64.2,0.6 ccw(c64.2,4.2) 67.8,4.2 67.8,54.2 ccw(c64.2,54.2) 64.2,57.8 4.2,57.8 ccw(c4.2,54.2) 0.6,54.2 0.594,4.2

## Other copper
Top Layer:
  pour cut-out: 66.4,31.2 66.6,31 66.6,26.69 66.388,26.478 64.822,26.478 64.6,26.7 64.6,31 64.8,31.2
  pour cut-out: 3,29 3,24.6 6,24.6 6,28.997
  pour cut-out: 45.8,55.45 52.4,55.45 52.6,55.65 52.6,57.25 52.403,57.447 52.403,57.45 45.8,57.45 45.604,57.254 45.604,55.65
Bottom Layer:
  pour cut-out: 2,28.6 2.4,29 7.2,29 7.6,28.6 7.6,25 7.2,24.6 2.4,24.6 2,25

## Silkscreen, mask and mechanical layers (free items; w line width, h text height)
Top Overlay:
  drawing of 21 lines, arcs and shapes, not listed
  text "D16 OFF-pin" at 29,55.95 h0.7
  text "Output" at 53.301,55.7 h1.2
  text "1=Turn on" at 29,54.917 h0.7
  text "Power" at 53.301,54.1 h1.2
  text "D3 nFGD-pin" at 29,53.381 h0.7
  text "Normal" at 53.301,52.5 h1.2
  text "1=Working" at 29,52.16 h0.7
  text "+" at 28.374,49.4 h2
  text "MAX" at 62.051,47.298 h1.5
  text "20A" at 62.051,45.098 h1.5
  text "ON" at 2.476,38.25 h1.5
  text "+" at 54.6,26.6 h2
  text "Power" at 62.8,26.6 h0.8 r90
  text "Output" at 64.2,26.6 h0.8 r90
  text "ON" at 63,19.527 h1.5
  text "D17 OFF-pin" at 14,15.6 h0.8
  text "1=Turn on" at 16.25,14.4 h0.8
  text "PC PowerBoard" at 44.2,13.9 h1.3
  text "D12 nFGD-pin" at 14.025,12.8 h0.8
  text "Computer Only" at 44.2,11.7 h1.3
  text "1=Working" at 16.4,11.4 h0.8
  text "REV4" at 44.2,9.65 h0.8
  text "Henry Lau" at 48.038,9.65 h0.8
  text "ON" at 2.6,8 h1.5
  text "2020/07" at 44.2,7.9 h0.7
  text "+" at 28.8,3.2 h2
Bottom Overlay:
  drawing of 260 lines, arcs and shapes, not listed
  text "OK / RIP" at 6.843,19.288 h3 r270
Top Solder:
  lines w2: 53,35.2 63.2,35.2
  lines w2.2: 44.2,17.2 44.2,44.7
  lines w4: 25.2,45.8 25.2,47.4 ; 27,12.5 27,16.6 31.6,21.2
Bottom Solder:
  lines w2: 18.15,7.1 18.15,16.4 ; 18.15,48.2 18.15,53.3 ; 34,47.2 37.8,47.2 ; 44.6,53 49,46.2 56.079,46.138
  lines w5: 55.2,35.2 61.6,35.2

## Text inside footprints (layer, text, board x,y; h text height)
D1: Top Overlay "A" at 33.4,35.15 h0.8 r90; Top Overlay "K" at 33.4,36.25 h0.8 r90
D2: Top Overlay "K" at 25.9,35.8 h0.8 r180; Top Overlay "A" at 26.9,35.8 h0.8 r180
D4: Bottom Overlay "K" at 56.2,28.286 h0.8; Bottom Overlay "A" at 57.2,28.286 h0.8
D6: Top Overlay "K" at 17.8,39.3 h0.8 r270; Top Overlay "A" at 17.8,40.3 h0.8 r270
D7: Top Overlay "K" at 26.3,26.8 h0.8; Top Overlay "A" at 27.3,26.8 h0.8
D8: Top Overlay "K" at 17.4,23.173 h0.8 r90; Top Overlay "A" at 17.4,22.173 h0.8 r90
D9: Top Overlay "K" at 43.6,11.9 h0.7 r90; Top Overlay "A" at 43.6,10.8 h0.7 r90
D11: Top Overlay "K" at 31.3,7 h0.8 r180; Top Overlay "A" at 32.3,7 h0.8 r180
D15: Top Overlay "K" at 37.9,2.473 h0.8; Top Overlay "A" at 36.9,2.473 h0.8
D18: Top Overlay "K" at 11.451,29.475 h0.8 r270; Top Overlay "A" at 11.451,30.475 h0.8 r270
P1: Top Overlay "+" at 27.3,56.2 h0.8 r180; Top Overlay "M" at 27.3,53.7 h0.8 r180
P2: Top Overlay "F" at 59.979,46.138 h0.8 r90; Top Overlay "+" at 60.879,40.738 h0.8 r90
P3: Top Overlay "M" at 27.3,7.5 h0.8 r180; Top Overlay "+" at 27.3,10 h0.8 r180